# Altium PCB RP2040T.PcbDoc
Units mm, origin at the board's own origin, x right, y up, seen from the top; angles counter-clockwise.
Board outline 40 x 20 mm, 2 copper layers (Top Layer, Bottom Layer); 2 components, 2 nets, 85 pads, 0 vias.
Unrouted connection lines stored in the file: 2.
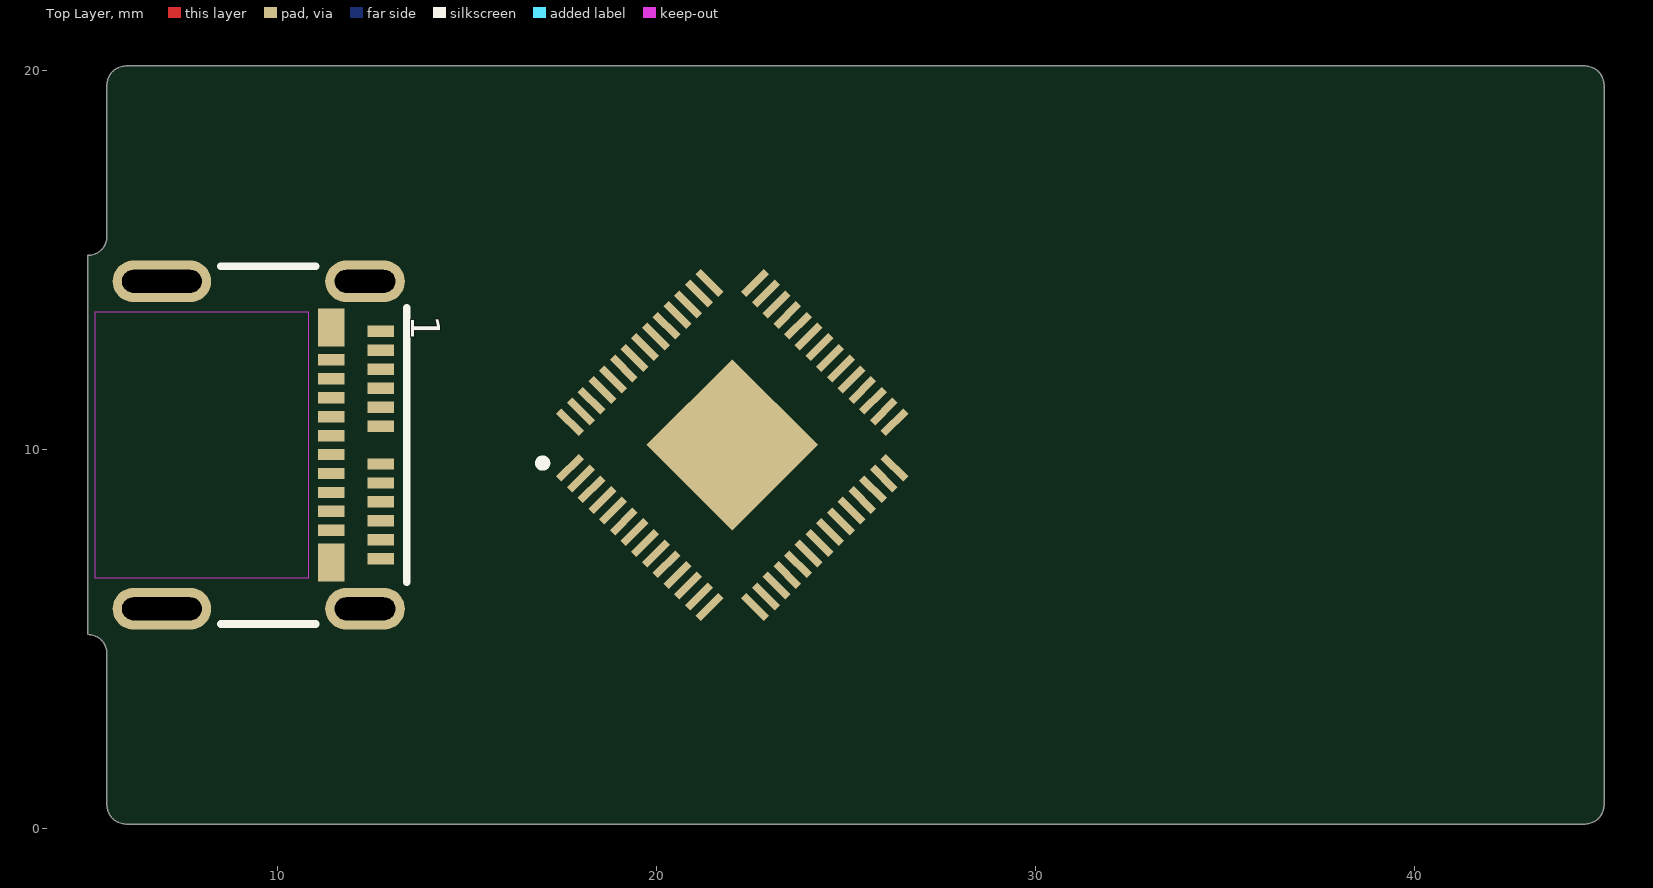
[diagram p0: Top Layer view]
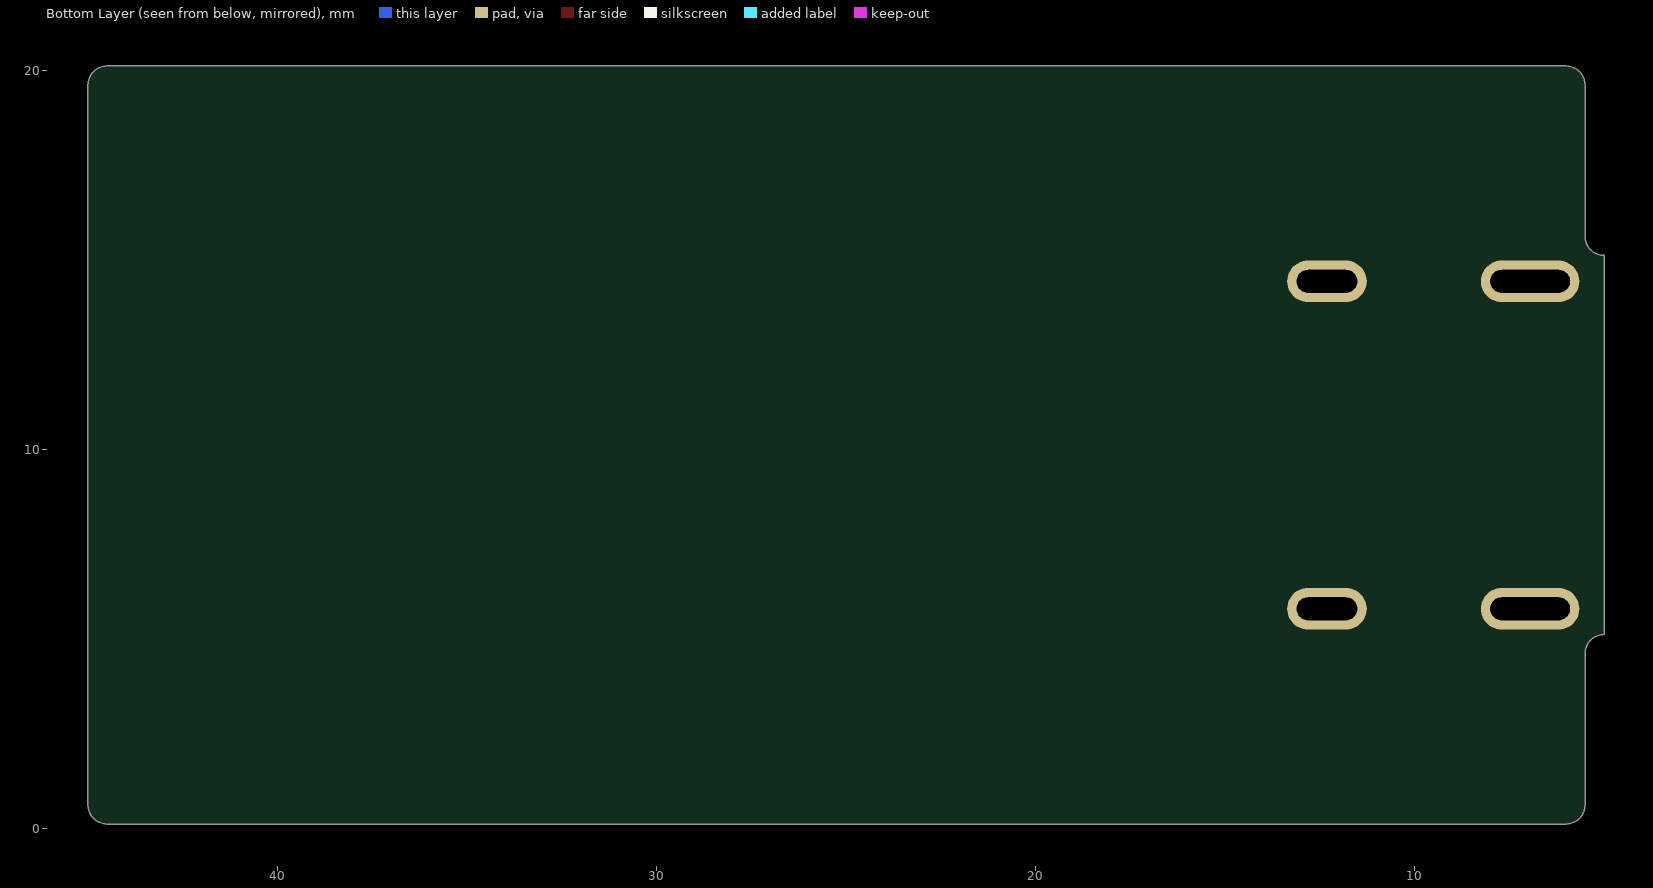
[diagram p1: Bottom Layer view, seen from below]

## Layer stack, top to bottom
Top Solder: solder mask 0.0102, Solder Resist, Dk 3.5
Top Layer: signal copper 0.0356
Dielectric 1: dielectric 0.32, FR-4, Dk 4.8
Bottom Layer: signal copper 0.0356
Bottom Solder: solder mask 0.0102, Solder Resist, Dk 3.5

## Board outline
5.5,4.627 ccw(c5,4.627) 5,5.127 5,15.127 ccw(c5,15.627) 5.5,15.627 5.5,19.627 cw(c6,19.627) 6,20.127 44.5,20.127 cw(c44.5,19.627) 45,19.627 45,0.627 cw(c44.5,0.627) 44.5,0.127 6,0.127 cw(c6,0.627) 5.5,0.627

## Design rules (kind name [scope] priority, off if disabled: settings)
Clearance [All] p1: gap=0.254 ignorepadtopadclearanceinfootprint=FALSE except(0: Arc-Hole Track-Hole SMDPad-Hole THPad-Hole Via-Hole Fill-Hole Poly-Hole Region-Hole Text-Hole)
PolygonConnect [All] p1: connectstyle=Relief reliefconductorwidth=0.254 reliefentries=4 polygonreliefangle="90 Angle" airgapwidth=0.254
RoutingVias [All] p1: holewidth=0.711 width=1.27 viastyle="Through Hole" minholewidth=0.711 minwidth=1.27 maxholewidth=0.711 maxwidth=1.27
SolderMaskExpansion [All] p1: expansion=0.102 istentingtop=FALSE
Width [All] p1: maxlimit=0.254 minlimit=0.254 preferedwidth=0.254
30 further rules are at their usual default settings.

## Components (designator, comment, footprint, x,y, rotation, side; value= is the part's Value field where it differs from the comment)
IC? "RP2040" QFN40P700X700X90-57N-D 22,10.127 r45 top
J? "CON_FEM-1R_28P_EU" CON_12551AF06_SMT_28P 9.05,10.125 r270 top

## Footprints (in the part's own frame and the unit in brackets; to place one, negate y for a bottom-side part, rotate by r counter-clockwise, add the part's x,y. Pads: shape width x height; smd on the part's side, far side on the other; paste and mask are expansions set on the pad)
CON_12551AF06_SMT_28P [mm] "CONN^SM 24PIN USB C RECEP HORIZ"
  rect 0.3x0.7 smd: 1(-3,3.67) 2(-2.5,3.67) 3(-2,3.67) 4(-1.5,3.67) 5(-1,3.67) 6(-0.5,3.67) 7(0.5,3.67) 8(1,3.67) 9(1.5,3.67) 10(2,3.67) 11(2.5,3.67) 12(3,3.67) 14(2.25,2.37) 15(1.75,2.37) 16(1.25,2.37) 17(0.75,2.37) 18(0.25,2.37) 19(-0.25,2.37) 20(-0.75,2.37) 21(-1.25,2.37) 22(-1.75,2.37) 23(-2.25,2.37)
  rect 1x0.7 smd: 13(3.1,2.37) 24(-3.1,2.37)
  oval 1.1x2.1 hole 0.6 slot 1.6 at 90 deg: 25(-4.32,3.26) 26(4.32,3.26)
  oval 1.1x2.6 hole 0.6 slot 2.1 at 90 deg: 27(-4.32,-2.1) 28(4.32,-2.1)
  Top Layer keep-out region: -3.5,1.78 -3.5,-3.87 3.5,-3.87 3.5,1.78
  silkscreen extent -4.72,-0.54 4.72,4.36, body extent -4.57,-4.05 4.57,4.05, height 3.24
QFN40P700X700X90-57N-D [mm]
  rect 0.85x0.2 smd: 1(-3.45,2.6) 2(-3.45,2.2) 3(-3.45,1.8) 4(-3.45,1.4) 5(-3.45,1) 6(-3.45,0.6) 7(-3.45,0.2) 8(-3.45,-0.2) 9(-3.45,-0.6) 10(-3.45,-1) 11(-3.45,-1.4) 12(-3.45,-1.8) 13(-3.45,-2.2) 14(-3.45,-2.6) 29(3.45,-2.6) 30(3.45,-2.2) 31(3.45,-1.8) 32(3.45,-1.4) 33(3.45,-1) 34(3.45,-0.6) 35(3.45,-0.2) 36(3.45,0.2) 37(3.45,0.6) 38(3.45,1) 39(3.45,1.4) 40(3.45,1.8) 41(3.45,2.2) 42(3.45,2.6)
  rect 0.2x0.85 smd: 15(-2.6,-3.45) 16(-2.2,-3.45) 17(-1.8,-3.45) 18(-1.4,-3.45) 19(-1,-3.45) 20(-0.6,-3.45) 21(-0.2,-3.45) 22(0.2,-3.45) 23(0.6,-3.45) 24(1,-3.45) 25(1.4,-3.45) 26(1.8,-3.45) 27(2.2,-3.45) 28(2.6,-3.45) 43(2.6,3.45) 44(2.2,3.45) 45(1.8,3.45) 46(1.4,3.45) 47(1,3.45) 48(0.6,3.45) 49(0.2,3.45) 50(-0.2,3.45) 51(-0.6,3.45) 52(-1,3.45) 53(-1.4,3.45) 54(-1.8,3.45) 55(-2.2,3.45) 56(-2.6,3.45)
  rect 3.2x3.2 smd: 57(0,0)
  silkscreen extent -3.97,3.1 -3.78,3.3, body extent -3.55,-3.55 3.55,3.55, height 0.9

## Part data
IC?: "Integrated Circuit", Manufacturer_Name=RASPBERRY-PI, Datasheet Link=https://datasheets.raspberrypi.org/rp2040/rp2040-datasheet.pdf, Height=0.9mm, Manufacturer_Part_Number=RP2040
J?: library part 12551AF06, "CONN^SM 24PIN USB C RECEP HORIZ", SCH_VALUE=USB, CPN=12551AF06, LIB_STATE=NEW, SUBTYPE=FEM-1R

## Nets (pads, with @x,y where several pads share a name; then routed paths per layer and width w, separated by ;. In a path a pad name is that pad's centre, name@x,y a point inside that pad or via, vN(x,y) a via of type N, cw(c..) or ccw(c..) an arc to the next point about the centre after c; other vN are vias at no path point)
NetIC?_4: IC?.4 J?.21
NetIC?_13: IC?.13 J?.12
pads on no net: IC?.1 IC?.2 IC?.3 IC?.5 IC?.6 IC?.7 IC?.8 IC?.9 IC?.10 IC?.11 IC?.12 IC?.14 IC?.15 IC?.16 IC?.17 IC?.18 IC?.19 IC?.20 IC?.21 IC?.22 IC?.23 IC?.24 IC?.25 IC?.26 IC?.27 IC?.28 IC?.29 IC?.30 IC?.31 IC?.32 IC?.33 IC?.34 IC?.35 IC?.36 IC?.37 IC?.38 IC?.39 IC?.40 IC?.41 IC?.42 IC?.43 IC?.44 IC?.45 IC?.46 IC?.47 IC?.48 IC?.49 IC?.50 IC?.51 IC?.52 IC?.53 IC?.54 IC?.55 IC?.56 IC?.57 J?.1 J?.2 J?.3 J?.4 J?.5 J?.6 J?.7 J?.8 J?.9 J?.10 J?.11 J?.13 J?.14 J?.15 J?.16 J?.17 J?.18 J?.19 J?.20 J?.22 J?.23 J?.24 J?.25 J?.26 J?.27 J?.28

## Silkscreen, mask and mechanical layers (free items; w line width, h text height)
Mechanical 1:
  the board outline again, w0.254

## Text inside footprints (layer, text, board x,y; h text height)
J?: Top Overlay "1" at 13.528,13.555 h0.76 r270